# Altium PCB TP1PCB.PcbDoc
Units mm, origin at the board's own origin, x right, y up, seen from the top; angles counter-clockwise.
Board outline 100.05 x 100 mm, 3 copper layers (Top Layer, GND, Bottom Layer), stack 0.488 mm thick; 75 components, 44 nets, 206 pads, 6 vias.
Unrouted connection lines stored in the file: 2.
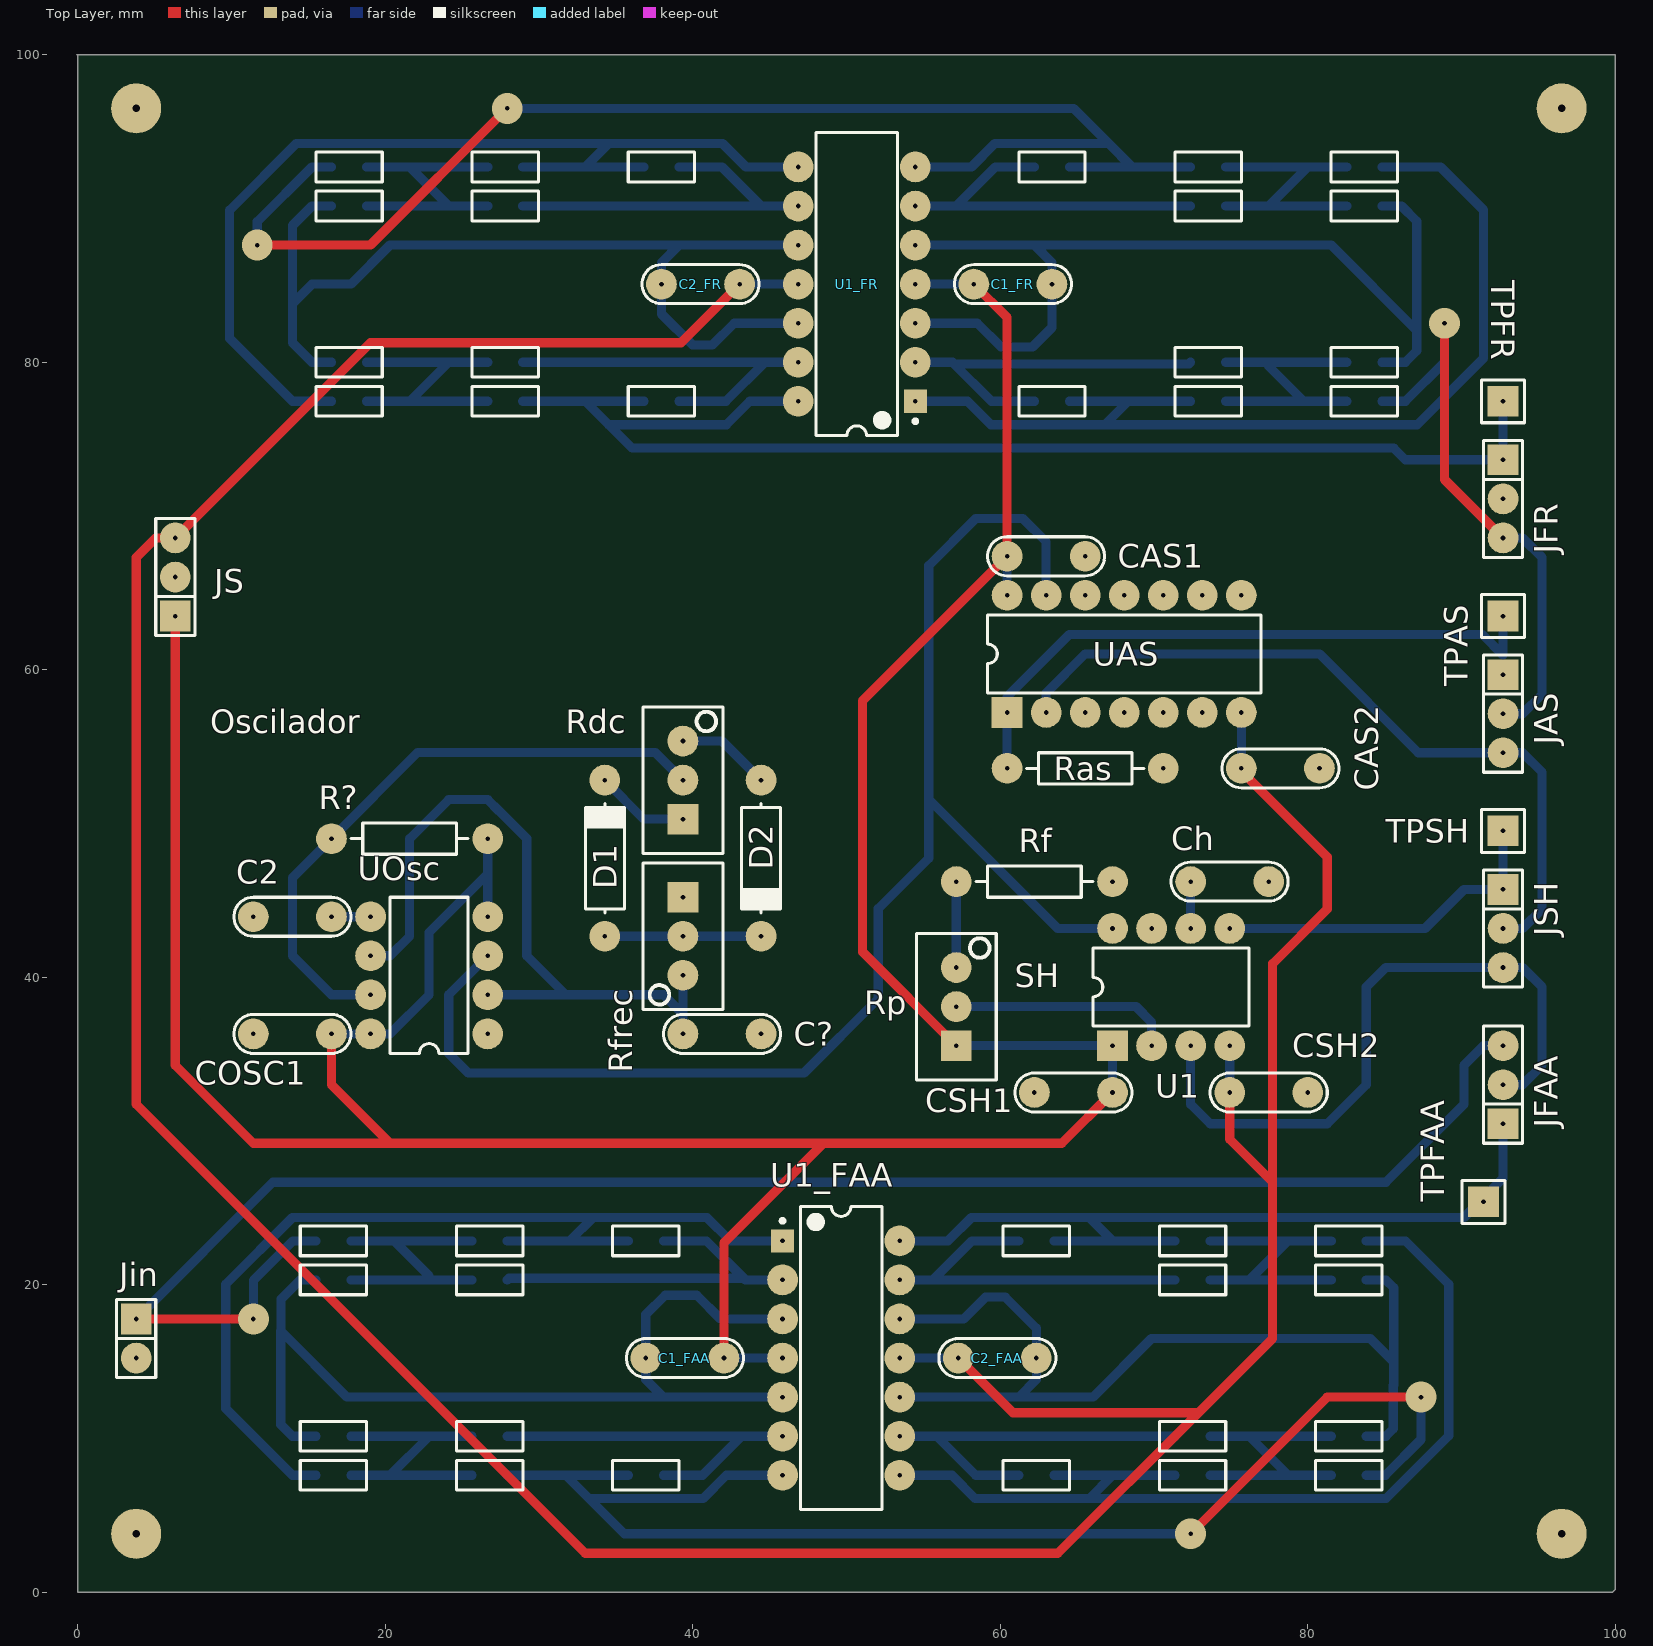
[diagram p0: Top Layer view]
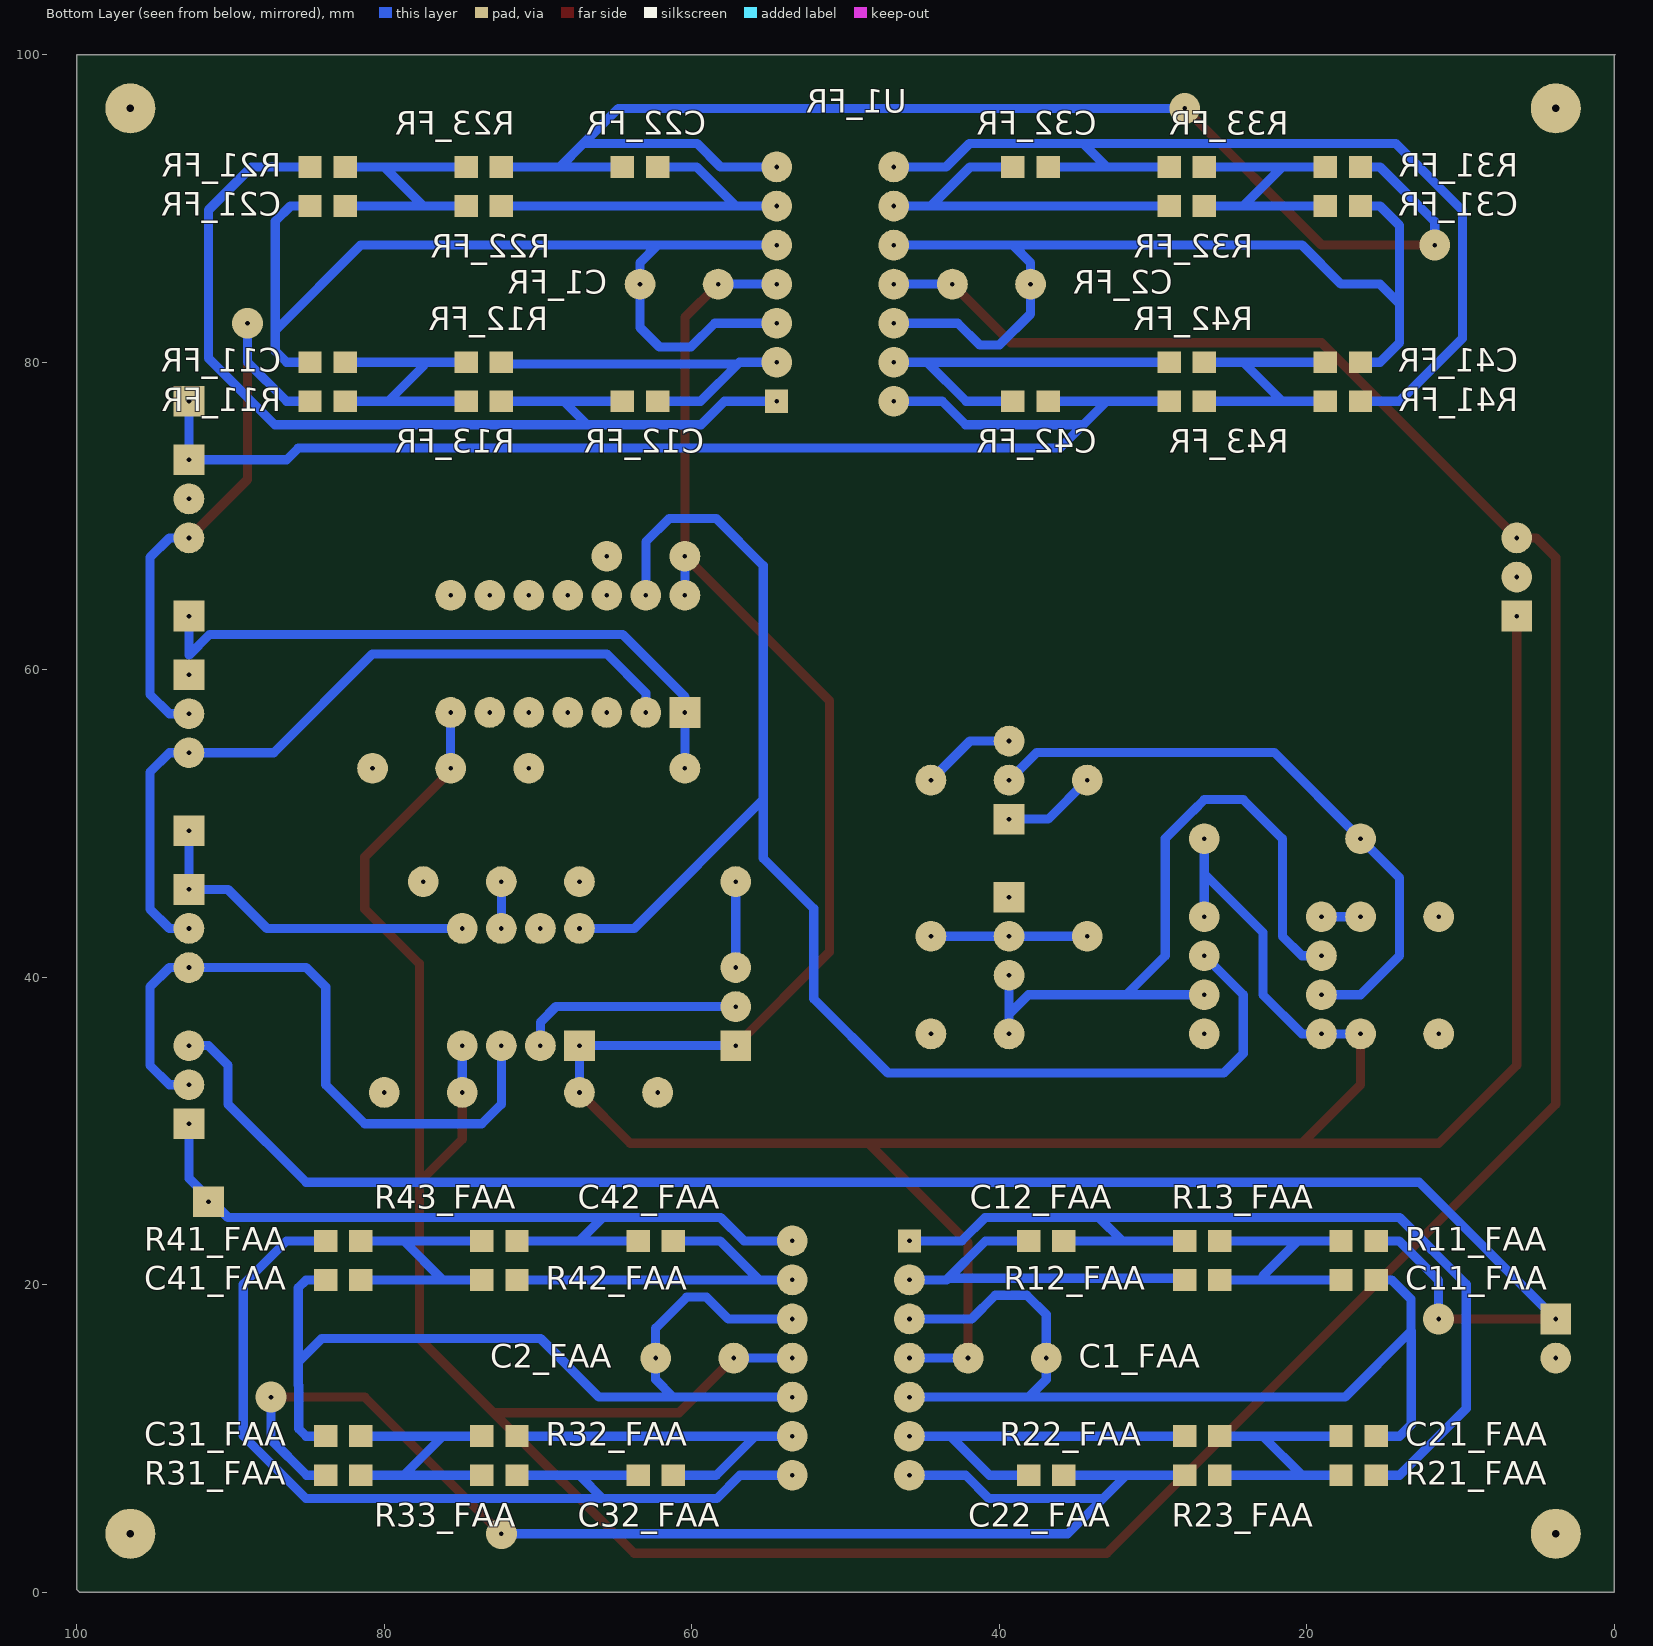
[diagram p1: Bottom Layer view, seen from below]
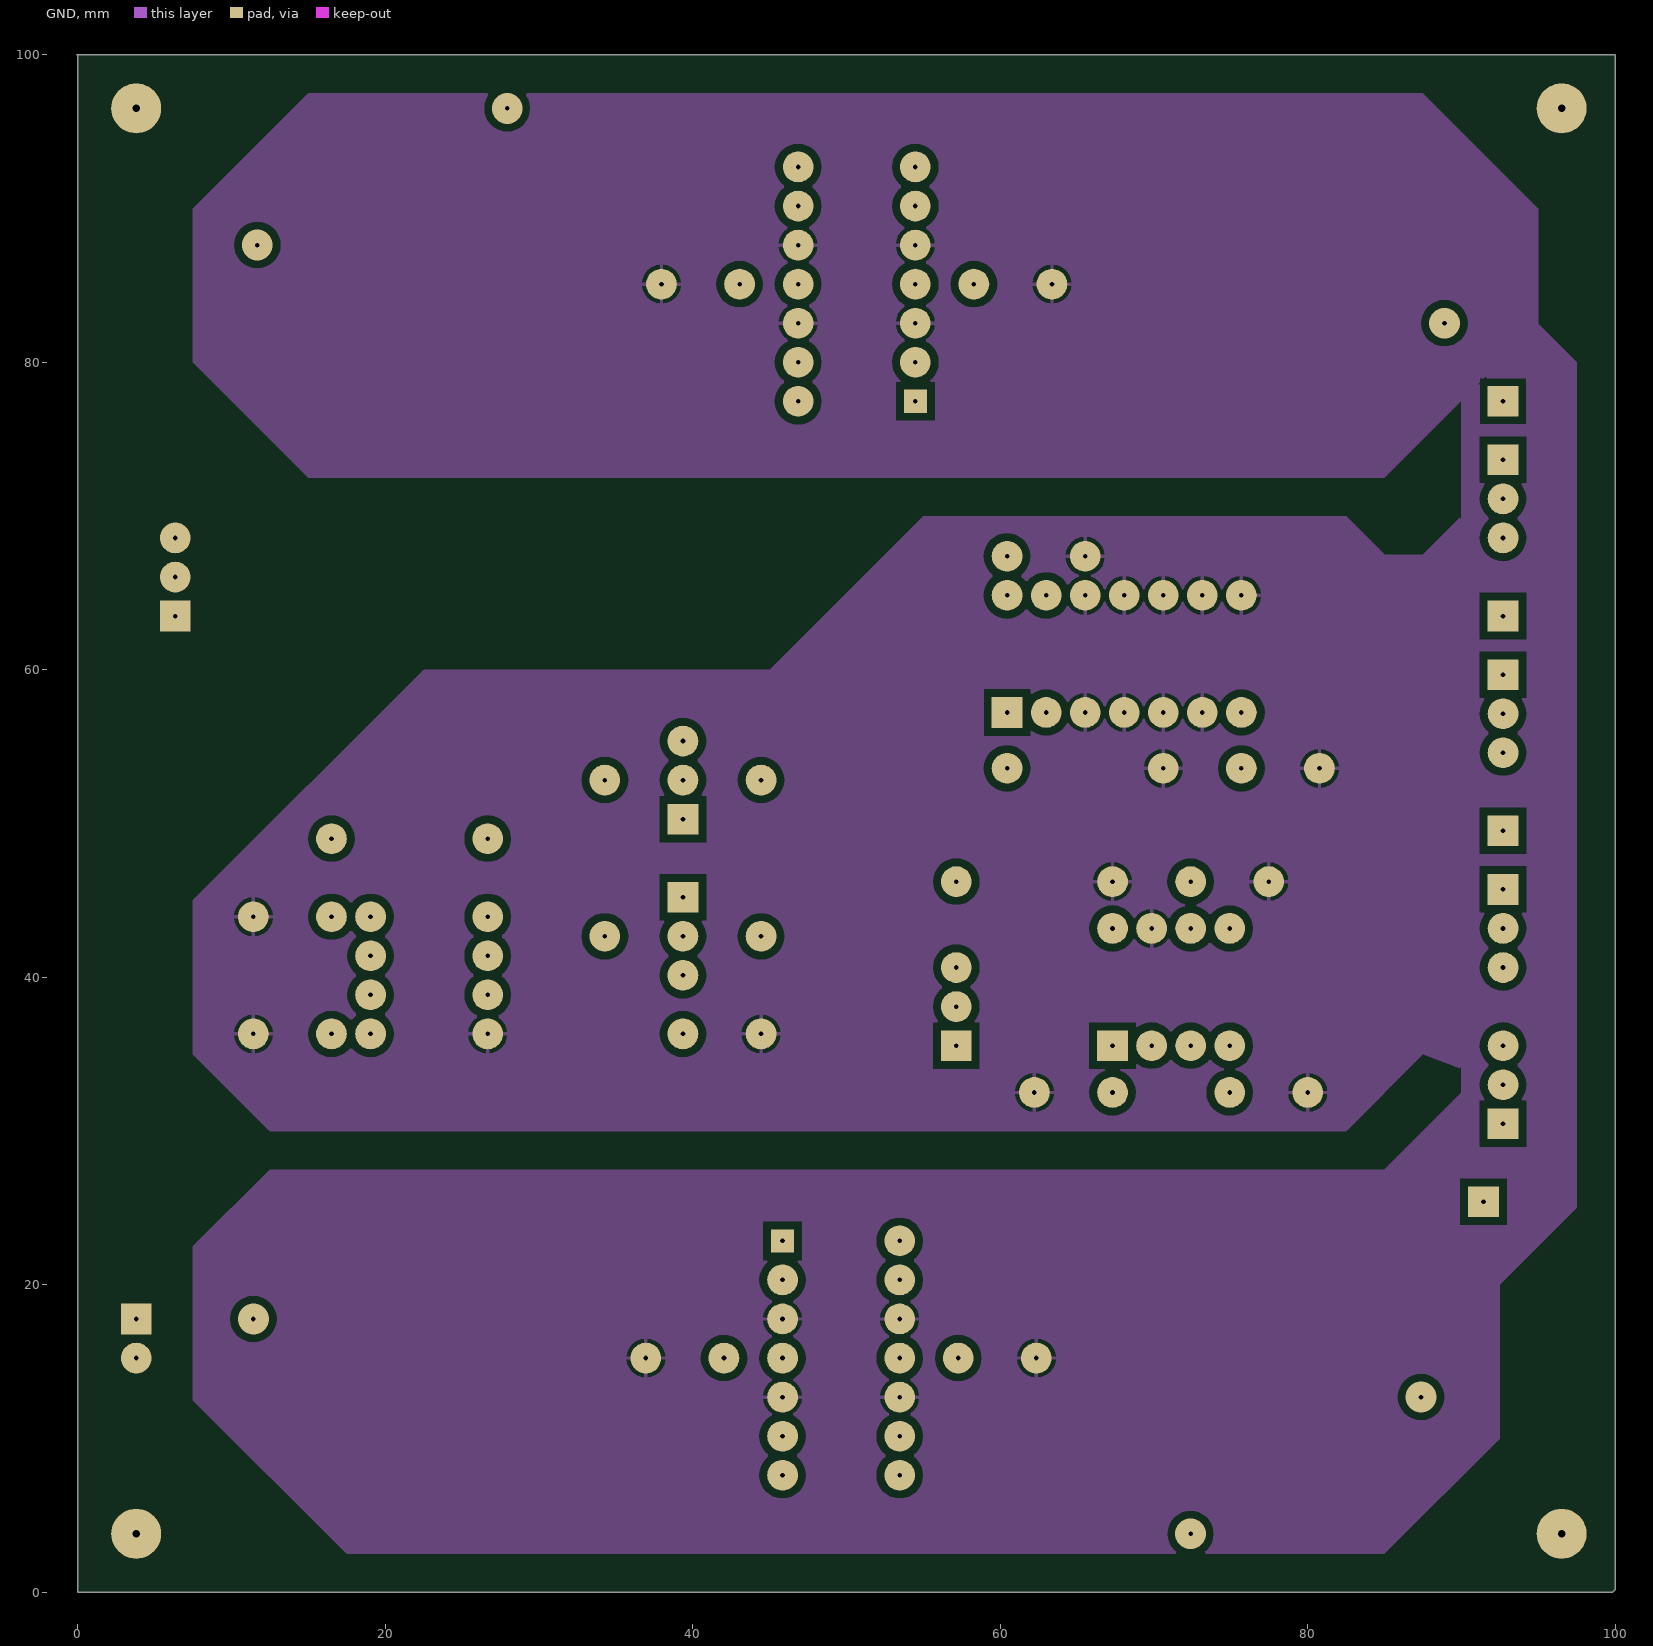
[diagram p2: GND]
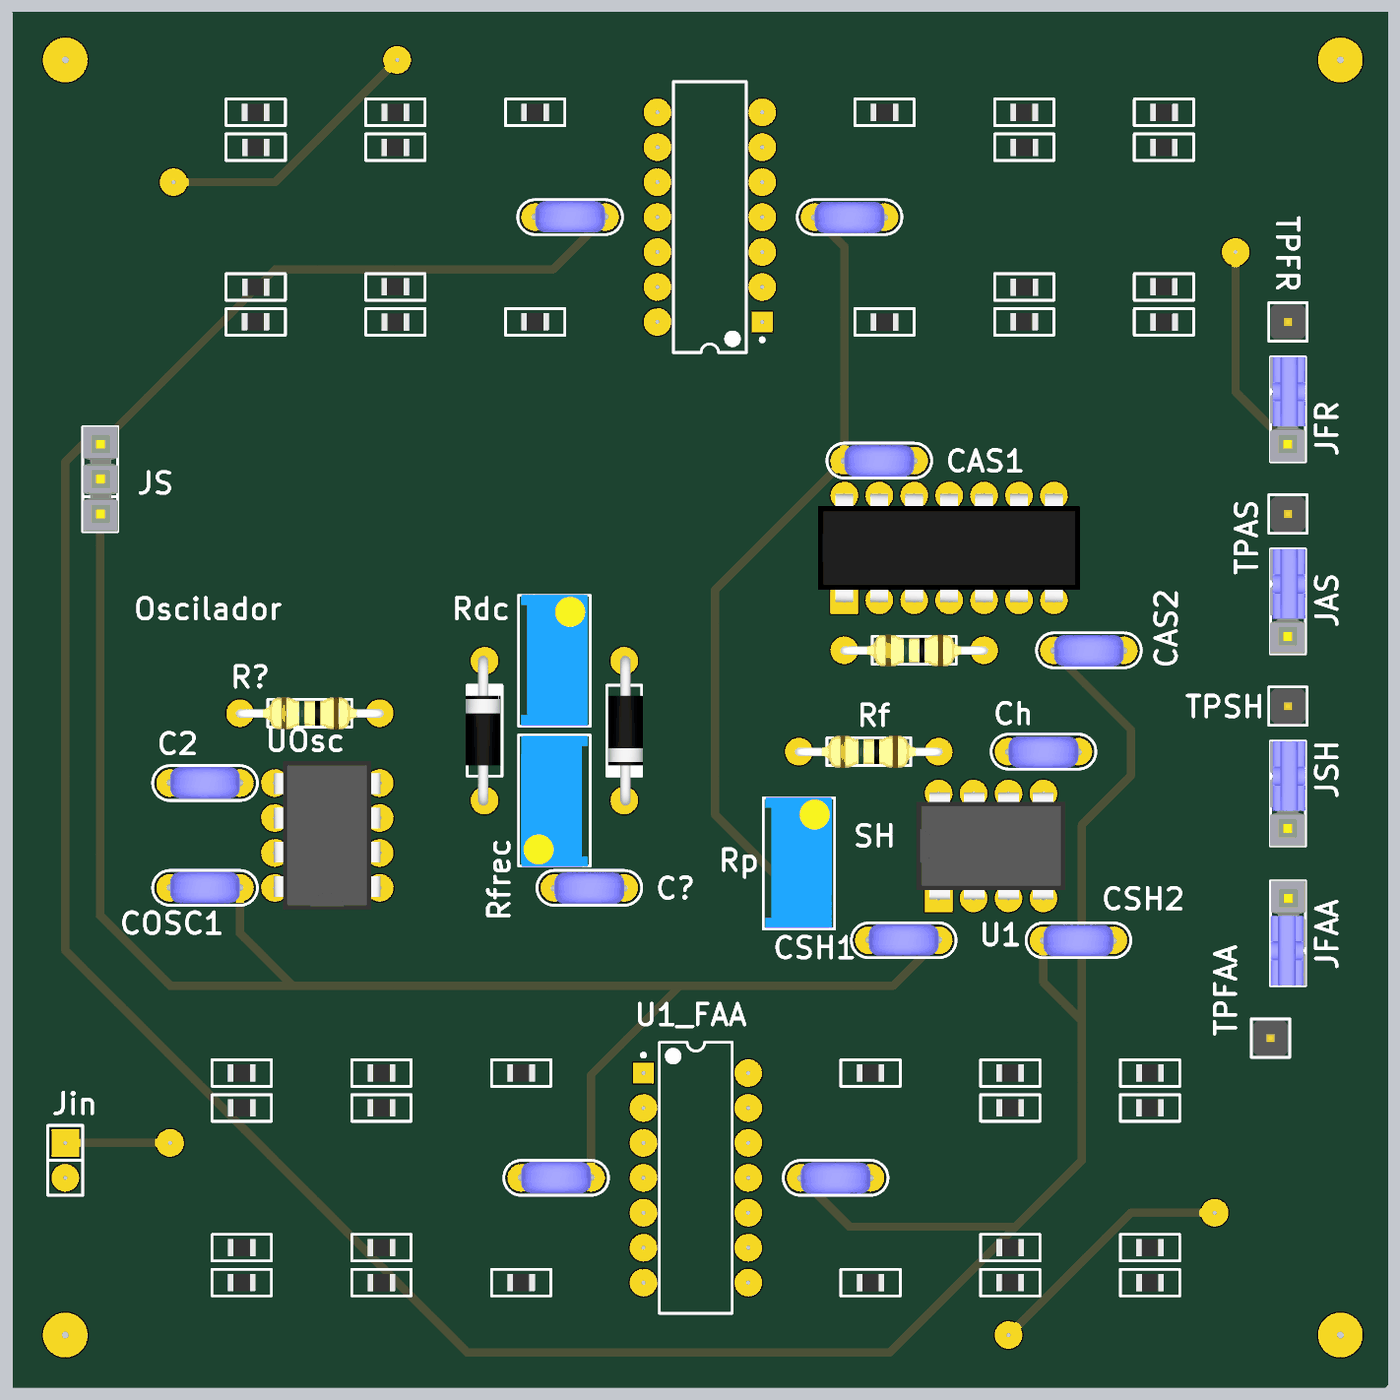
[diagram p3: 3D render of the assembled board from above, using the file's embedded part models]

## Layer stack, top to bottom
Top Solder: solder mask 0.0102, Solder Resist, Dk 3.5
Top Layer: signal copper 0.0356
Dielectric 1: core 0.254, FR-4, Dk 4.2
GND: signal copper 0.036
Dielectric 2: prepreg 0.127, Dk 4.2
Bottom Layer: signal copper 0.0356
Bottom Solder: solder mask 0.0102, Solder Resist, Dk 3.5

## Board outline
-0.05,100 0,99.95 0,0 99.825,0 100,0.175 100,100

## Design rules (kind name [scope] priority, off if disabled: settings)
Clearance [All] p1: gap=0.5 ignorepadtopadclearanceinfootprint=FALSE
PlaneConnect [All] p1: planeconnectstyle=Relief reliefexpansion=0.5 reliefentries=4 reliefconductorwidth=0.6 reliefairgap=0.6
PolygonConnect [All] p1: connectstyle=Relief reliefconductorwidth=0.254 reliefentries=4 polygonreliefangle="90 Angle" airgapwidth=0.254
RoomDefinition AS [InComponentClass('AS')] p1: confinementstyle=ConfineIn formatcopy=TRUE lockcomponents=FALSE outline 85.09,50.8 85.09,69.928 58.42,69.928 58.42,50.8
RoomDefinition Osc [InComponentClass('Osc')] p2: confinementstyle=ConfineIn formatcopy=TRUE lockcomponents=FALSE outline 6.35,31.75 52.07,31.75 52.07,58.928 6.35,58.928
RoomDefinition SH [InComponentClass('SH')] p3: confinementstyle=ConfineIn formatcopy=TRUE lockcomponents=FALSE outline 85.09,30.48 85.09,50.8 53.34,50.8 53.34,30.48
RoomDefinition FR [InComponentClass('FR')] p4: confinementstyle=ConfineIn formatcopy=TRUE lockcomponents=FALSE outline 97.79,97.79 3.81,97.79 3.81,72.39 97.79,72.39
RoomDefinition FAA [InComponentClass('FAA')] p5: confinementstyle=ConfineIn formatcopy=TRUE lockcomponents=FALSE outline 2.54,2.54 96.52,2.54 96.52,27.94 2.54,27.94
RoutingVias [All] p1: holewidth=0.3 width=1.5 viastyle="Through Hole" minholewidth=0.3 minwidth=1.5 maxholewidth=0.6 maxwidth=2
SolderMaskExpansion [All] p1: expansion=0.102
Width [All] p1: maxlimit=0.9 minlimit=0.6 preferedwidth=0.6
29 further rules are at their usual default settings.

## Classes and differential pairs
component class Osc: C2 C? COSC1 D1 D2 R? Rdc Rfrec UOsc
component class AS: CAS1 CAS2 CD4066 R1 Ras UAS
channel class LowPassFilter: FAA FR
component class TP1SCH: JAS JFAA JFR Jin JS JSH TPAS TPFAA TPFR TPSH
component class SH: Ch CSH1 CSH2 Rf Rp U1
component class FR: C1_FR C2_FR C11_FR C12_FR C21_FR C22_FR C31_FR C32_FR C41_FR C42_FR R11_FR R12_FR R13_FR R21_FR R22_FR R23_FR R31_FR R32_FR R33_FR R41_FR R42_FR R43_FR U1_FR
component class FAA: C1_FAA C2_FAA C11_FAA C12_FAA C21_FAA C22_FAA C31_FAA C32_FAA C41_FAA C42_FAA R11_FAA R12_FAA R13_FAA R21_FAA R22_FAA R23_FAA R31_FAA R32_FAA R33_FAA R41_FAA R42_FAA R43_FAA U1_FAA

## Components (designator, comment, footprint, x,y, rotation, side; value= is the part's Value field where it differs from the comment)
C1_FAA "CAP" CAP200 39.497,15.24 r180 top (schematic designator C1)
C1_FR "CAP" CAP200 60.833,85.09 r0 top (schematic designator C1)
C2 "10n" CAP200 13.97,43.942 r180 top
C2_FAA "CAP" CAP200 59.817,15.24 r0 top (schematic designator C2)
C2_FR "CAP" CAP200 40.513,85.09 r180 top (schematic designator C2)
C11_FAA "CAP" 0805 16.637,20.32 r180 top (schematic designator C11)
C11_FR "CAP" 0805 83.693,80.01 r0 top (schematic designator C11)
C12_FAA "CAP" 0805 36.957,22.86 r0 top (schematic designator C12)
C12_FR "CAP" 0805 63.373,77.47 r180 top (schematic designator C12)
C21_FAA "CAP" 0805 16.637,10.16 r180 top (schematic designator C21)
C21_FR "CAP" 0805 83.693,90.17 r0 top (schematic designator C21)
C22_FAA "CAP" 0805 36.957,7.62 r0 top (schematic designator C22)
C22_FR "CAP" 0805 63.373,92.71 r180 top (schematic designator C22)
C31_FAA "CAP" 0805 82.677,10.16 r0 top (schematic designator C31)
C31_FR "CAP" 0805 17.653,90.17 r180 top (schematic designator C31)
C32_FAA "CAP" 0805 62.357,7.62 r180 top (schematic designator C32)
C32_FR "CAP" 0805 37.973,92.71 r0 top (schematic designator C32)
C41_FAA "CAP" 0805 82.677,20.32 r0 top (schematic designator C41)
C41_FR "CAP" 0805 17.653,80.01 r180 top (schematic designator C41)
C42_FAA "CAP" 0805 62.357,22.86 r180 top (schematic designator C42)
C42_FR "CAP" 0805 37.973,77.47 r0 top (schematic designator C42)
C? "CAP" CAP200 41.91,36.322 r0 top
CAS1 "CAP" CAP200 62.992,67.388 r0 top
CAS2 "CAP" CAP200 78.232,53.594 r0 top
Ch "CAP" CAP200 74.93,46.228 r0 top
COSC1 "CAP" CAP200 13.97,36.322 r180 top
CSH1 "CAP" CAP200 64.77,32.512 r180 top
CSH2 "CAP" CAP200 77.47,32.512 r0 top
D1 "DIODO" DO41 34.29,47.752 r90 top
D2 "DIODO" DO41 44.45,47.752 r270 top
JAS "JUMPER" JUMPER3 92.71,57.15 r270 top
JFAA "JUMPER" JUMPER3 92.71,33.02 r90 top
JFR "JUMPER" JUMPER3 92.71,71.12 r270 top
Jin "CON2" SIP2 3.81,16.51 r270 top
JS "Fuente" SIP3 6.35,66.04 r90 top
JSH "JUMPER" JUMPER3 92.71,43.18 r270 top
R11_FAA "RES" 0805 16.637,22.86 r0 top (schematic designator R11)
R11_FR "RES" 0805 83.693,77.47 r180 top (schematic designator R11)
R12_FAA "RES" 0805 26.797,20.32 r0 top (schematic designator R12)
R12_FR "RES" 0805 73.533,80.01 r180 top (schematic designator R12)
R13_FAA "RES" 0805 26.797,22.86 r180 top (schematic designator R13)
R13_FR "RES" 0805 73.533,77.47 r0 top (schematic designator R13)
R21_FAA "RES" 0805 16.637,7.62 r0 top (schematic designator R21)
R21_FR "RES" 0805 83.693,92.71 r180 top (schematic designator R21)
R22_FAA "RES" 0805 26.797,10.16 r0 top (schematic designator R22)
R22_FR "RES" 0805 73.533,90.17 r180 top (schematic designator R22)
R23_FAA "RES" 0805 26.797,7.62 r180 top (schematic designator R23)
R23_FR "RES" 0805 73.533,92.71 r0 top (schematic designator R23)
R31_FAA "RES" 0805 82.677,7.62 r180 top (schematic designator R31)
R31_FR "RES" 0805 17.653,92.71 r0 top (schematic designator R31)
R32_FAA "RES" 0805 72.517,10.16 r180 top (schematic designator R32)
R32_FR "RES" 0805 27.813,90.17 r0 top (schematic designator R32)
R33_FAA "RES" 0805 72.517,7.62 r0 top (schematic designator R33)
R33_FR "RES" 0805 27.813,92.71 r180 top (schematic designator R33)
R41_FAA "RES" 0805 82.677,22.86 r180 top (schematic designator R41)
R41_FR "RES" 0805 17.653,77.47 r0 top (schematic designator R41)
R42_FAA "RES" 0805 72.517,20.32 r180 top (schematic designator R42)
R42_FR "RES" 0805 27.813,80.01 r0 top (schematic designator R42)
R43_FAA "RES" 0805 72.517,22.86 r0 top (schematic designator R43)
R43_FR "RES" 0805 27.813,77.47 r180 top (schematic designator R43)
R? "RES" RES400 26.67,49.022 r180 top
Ras "10k" RES400 70.612,53.594 r180 top
Rdc "PRESET" "PRESET V" 39.37,52.832 r90 top
Rf "RES" RES400 67.31,46.228 r180 top
Rfrec "PRESET" "PRESET V" 39.37,42.672 r270 top
Rp "PRESET" "PRESET V" 57.15,38.1 r90 top
TPAS "TP" TPTH 92.71,63.5 r90 top
TPFAA "TP" TPTH 91.44,25.4 r90 top
TPFR "TP" TPTH 92.71,77.47 r0 top
TPSH "TP" TPTH 92.71,49.53 r90 top
U1 "LF398" DIP8#1 67.31,35.56 r90 top
U1_FAA "TL084ACN" TI-N14 49.657,15.24 r0 top (schematic designator U1)
U1_FR "TL084ACN" TI-N14 50.673,85.09 r180 top (schematic designator U1)
UAS "CD4066" DIP14 60.452,57.228 r90 top
UOsc "NE 555" DIP8#2 26.67,36.322 r180 top

## Footprints (in the part's own frame and the unit in brackets; to place one, negate y for a bottom-side part, rotate by r counter-clockwise, add the part's x,y. Pads: shape width x height; smd on the part's side, far side on the other; paste and mask are expansions set on the pad)
0805 [mil] "Pasivo 0805"
  rect 60x56 smd far side: 1(-45,0) 2(45,0)
  silkscreen extent -85,-38 85,38, body extent -40,-25 39,25, height 15
CAP200 [mm]
  round 2 hole 0.3: 1(-2.54,0) 2(2.54,0)
  silkscreen extent -3.81,-1.27 3.81,1.27, body extent -2.79,-1.17 2.79,1.12, height 6.24
DIP8#1 [mm]
  rect 2x2 hole 0.3: 1(0,0)
  round 2 hole 0.3: 2(0,-2.54) 3(0,-5.08) 4(0,-7.62) 5(7.62,-7.62) 6(7.62,-5.08) 7(7.62,-2.54) 8(7.62,0)
  silkscreen extent 1.27,-8.89 6.35,1.27, body extent -0.06,-9.21 7.7,1.59, height 4.5
DIP8#2 [mm]
  round 2 hole 0.3: 1(0,0) 2(0,-2.54) 3(0,-5.08) 4(0,-7.62) 5(7.62,-7.62) 6(7.62,-5.08) 7(7.62,-2.54) 8(7.62,0)
  silkscreen extent 1.27,-8.89 6.35,1.27, body extent -0.06,-9.21 7.7,1.59, height 4.5
DIP14 [mm]
  rect 2x2 hole 0.3: 1(0,0)
  round 2 hole 0.3: 2(0,-2.54) 3(0,-5.08) 4(0,-7.62) 5(0,-10.16) 6(0,-12.7) 7(0,-15.24) 8(7.62,-15.24) 9(7.62,-12.7) 10(7.62,-10.16) 11(7.62,-7.62) 12(7.62,-5.08) 13(7.62,-2.54) 14(7.62,0)
  silkscreen extent 1.27,-16.51 6.35,1.27, body extent -0.13,-17.14 7.75,1.9, height 4.19
DO41 [mm]
  round 2 hole 0.3: 1(-5.08,0) 2(5.08,0)
  silkscreen extent -3.56,-1.27 3.56,1.27, body extent -5.46,-1.19 5.46,1.37, height 2.03
JUMPER3 [mm]
  rect 2x2 hole 0.3: 1(-2.54,0)
  round 2 hole 0.3: 2(0,0) 3(2.54,0)
  silkscreen extent -3.81,-1.27 3.81,1.27, body extent -3.81,-1.3 3.81,1.27, height 16.15
"PRESET V" [mm]
  rect 2x2 hole 0.3: 1(-2.54,0)
  round 2 hole 0.3: 2(0,0) 3(2.54,0)
  silkscreen extent -4.76,-2.6 4.76,2.6, body extent -4.7,-2.42 4.83,2.42, height 11.55
RES400 [mm]
  round 2 hole 0.3: 1(0,0) 2(10.16,0)
  silkscreen extent 1.27,-1.02 8.89,1.02, body extent -0.3,-1.14 10.46,1.17, height 2.43
SIP2 [mm]
  rect 2x2 hole 0.3: 1(-1.27,0)
  round 2 hole 0.3: 2(1.27,0)
  silkscreen extent -2.54,-1.27 2.54,1.27
SIP3 [mm]
  rect 2x2 hole 0.3: 1(-2.54,0)
  round 2 hole 0.3: 2(0,0) 3(2.54,0)
  silkscreen extent -3.81,-1.27 3.81,1.27, body extent -3.81,-1.3 3.81,1.24, height 8.38
TI-N14 [mm] "DIP, 14-Leads, Body 19.305x6.35 mm, Pitch 2.54 mm"
  rect 1.5x1.5 hole 0.3: 1(-3.81,7.62)
  round 2 hole 0.3: 2(-3.81,5.08) 3(-3.81,2.54) 4(-3.81,0) 5(-3.81,-2.54) 6(-3.81,-5.08) 7(-3.81,-7.62) 8(3.81,-7.62) 9(3.81,-5.08) 10(3.81,-2.54) 11(3.81,0) 12(3.81,2.54) 13(3.81,5.08) 14(3.81,7.62)
  silkscreen extent -3.93,-9.85 2.65,9.85, body extent -3.3,-9.85 3.3,9.85, height 5.08
TPTH [mm]
  rect 2x2 hole 0.3: 1(0,0)
  silkscreen extent -1.4,-1.4 1.4,1.4, body extent -1.27,-1.27 1.27,1.27, height 6.04

## Part data
C2: library part CAP
JAS JFAA JFR JSH: library part JUMPER3
JS: library part CON3
Ras: library part RES
U1 UOsc: library part IC_DIP8
U1_FAA U1_FR: "JFET-Input Operational Amplifier, 7 to 36 V, 0 to 70 degC, 14-pin DIP (N14), Pb-Free (RoHS)", Manufacturer="Texas Instruments", Rating=Catalog, Supplier Part Number 1=296-1782-5-ND, Total Supply Voltage(Max)(+5V is 5, +/-5V is 10)=36, Total Supply Voltage(Min)(+5V is 5, +/-5V is 10)=7, CMRR(Min)(dB)=75, Code_JEDEC=MS-001, ComponentLink1Description="Manufacturer URL", ComponentLink1URL=http://www.ti.com/, ComponentLink2Description=Datasheet, ComponentLink2URL=http://www.ti.com/lit/ds/symlink/tl084a.pdf, ComponentLink3Description="Package Specification", ComponentLink3URL=http://www.ti.com/lit/ml/mpdi002c/mpdi002c.pdf, DatasheetVersion=SLOS081G, Eco-Plan="Pb-Free (RoHS)", GBW(Typ)(MHz)=3, IIB(Max)(pA)=200, Iq per channel(Max)(mA)=2.8, Mounting Technology="Through Hole", Number of Channels=4, Offset Drift(Typ)(uV/C)=18, PackageDescription="14-Pin Plastic In-Line, Body 19.305 x 6.35 mm, Pitch 2.54 mm", PackageReference=N14, PackageVersion="4040049/E, 12/2002", PartNumber=TL084ACN, Slew Rate(Typ)(V/us)=13, Sub Family="General Purpose Amplifier, High Supply Voltage Amplifier (>=30V)", Supplier 1=Digi-Key, Supplier 2=Farnell, Supplier 3=Newark, Supplier 4=Mouser, Supplier Part Number 2=1106129, Supplier Part Number 3=08F9361, Supplier Part Number 4=595-TL084ACN, Vio (25C)(Max)(mV)=6, Vn at 1kHz(Typ)(nV/rtHz)=18
UAS: library part IC_DIP14

## Free pads (board coordinates)
  round 3.25 hole 0.5: 2(3.81,3.81) 2(3.81,96.52) 2(96.52,3.81) 2(96.52,96.52)

## Via types
v1: diameter 2, hole 0.3, Top Layer to Bottom Layer, 6 vias

## Nets (pads, with @x,y where several pads share a name; then routed paths per layer and width w, separated by ;. In a path a pad name is that pad's centre, name@x,y a point inside that pad or via, vN(x,y) a via of type N, cw(c..) or ccw(c..) an arc to the next point about the centre after c; other vN are vias at no path point)
+VCC: C1_FAA.1 C1_FR.1 CAS1.1 COSC1.1 CSH1.1 JS.1 R?.1 Rp.1 U1.1 U1_FAA.4 U1_FR.4 UAS.14 UOsc.4 UOsc.8 | length 221.1
  Top Layer w0.6: JS.1 6.35,34.29 11.43,29.21 20.32,29.21 ; COSC1.1 16.51,33.02 20.32,29.21 ; C1_FAA.1 42.037,22.733 48.514,29.21 ; Rp.1 57.144,35.56 51.048,41.656 51.048,57.984 CAS1.1 60.452,82.931 C1_FR.1 ; CSH1.1 64.008,29.21 48.514,29.21 ; 20.32,29.21 48.514,29.21
  Bottom Layer w0.6: COSC1.1 UOsc.8 20.32,36.322 22.86,38.862 22.86,42.926 26.67,46.736 ; UOsc.4 26.67,46.736 ; R?.1 26.67,46.736 ; C1_FAA.1 U1_FAA.4 ; U1_FR.4 C1_FR.1 ; Rp.1 U1.1 CSH1.1 ; UAS.14 CAS1.1
-VCC: C2_FAA.1 C2_FR.1 CAS2.1 CSH2.1 JS.3 U1.4 U1_FAA.11 U1_FR.11 UAS.7 | length 253
  Top Layer w0.6: C2_FR.1 39.243,81.28 19.05,81.28 JS.3 5.08,68.58 3.81,67.31 3.81,31.75 33.02,2.54 63.754,2.54 72.898,11.684 ; C2_FAA.1 60.833,11.684 72.898,11.684 ; CSH2.1 74.93,29.464 77.724,26.67 ; CAS2.1 75.692,53.418 81.28,47.83 81.28,44.45 77.724,40.894 77.724,26.67 ; 72.898,11.684 77.724,16.51 77.724,26.67
  Bottom Layer w0.6: C2_FR.1 U1_FR.11 ; U1_FAA.11 C2_FAA.1 ; CSH2.1 U1.4 ; CAS2.1 UAS.7@75.692,56.974
CTRL: U1.8 UAS.13 UOsc.3 | length 95.9
  Bottom Layer w0.6: UOsc.3 26.664,41.402 24.13,38.868 24.13,35.052 25.4,33.782 47.244,33.782 52.07,38.608 52.07,44.472 55.35,47.752 55.35,51.584 ; UAS.13 62.992,68.326 61.468,69.85 58.42,69.85 55.35,66.78 55.35,51.584 ; U1.8 63.754,43.18 55.35,51.584
Discharge: R?.2 Rdc.2 UOsc.7 | length 40.7
  Bottom Layer w0.6: UOsc.7 16.51,38.862 13.97,41.402 13.97,46.482 R?.2 22.12,54.632 37.57,54.632 37.57,54.626 39.364,52.832 Rdc.2
GND: C1_FAA.2 C1_FR.2 C2.2 C2_FAA.2 C2_FR.2 C11_FAA.2 C11_FR.2 C21_FAA.2 C21_FR.2 C31_FAA.2 C31_FR.2 C41_FAA.2 C41_FR.2 C?.2 CAS1.2 CAS2.2 Ch.2 COSC1.2 CSH1.2 CSH2.2 Jin.2 JS.2 Ras.1 Rf.1 U1.7 U1_FAA.3 U1_FAA.5 U1_FAA.10 U1_FAA.12 U1_FR.3 U1_FR.5 U1_FR.10 U1_FR.12 UAS.3 UAS.4 UAS.5 UAS.6 UAS.8 UAS.9 UAS.10 UAS.11 UAS.12 UOsc.1 | length 254.6
  Bottom Layer w0.6: C21_FAA.2 13.97,10.16 13.208,10.922 13.208,17.012 ; C11_FAA.2 14.478,20.32 13.23,19.072 13.23,17.034 13.208,17.012 ; C41_FR.2 15.24,80.01 13.97,81.28 13.97,83.82 ; C31_FR.2 15.24,90.17 13.97,88.9 13.97,83.82 ; U1_FAA.5 38.1,12.7 ; U1_FAA.3 41.816,17.78 40.266,19.33 38.22,19.33 36.957,18.067 C1_FAA.2 36.957,13.843 38.1,12.7 ; U1_FR.12 42.705,82.55 41.282,81.127 39.998,81.127 37.973,83.152 C2_FR.2 37.973,86.487 39.116,87.63 ; U1_FR.10 39.116,87.63 ; U1_FAA.10 61.214,12.7 ; U1_FAA.12 57.625,17.78 59.048,19.203 60.332,19.203 62.357,17.178 C2_FAA.2 62.357,13.843 61.214,12.7 ; U1_FR.3 58.514,82.55 60.064,81 62.11,81 63.373,82.263 C1_FR.2 63.373,86.487 62.23,87.63 ; U1_FR.5 62.23,87.63 ; C31_FAA.2 85.09,10.16 85.576,10.646 85.576,13.446 85.598,13.468 85.598,14.986 ; C41_FAA.2 85.09,20.32 85.598,19.812 85.598,14.986 ; C11_FR.2 86.36,80.01 87.1,80.75 87.1,82.064 ; C21_FR.2 86.106,90.17 87.1,89.176 87.1,82.064 ; 13.208,17.012 17.52,12.7 38.1,12.7 ; 13.97,83.82 15.24,85.09 17.78,85.09 20.32,87.63 39.116,87.63 ; 61.214,12.7 66.04,12.7 69.85,16.51 84.074,16.51 85.598,14.986 ; 62.23,87.63 81.534,87.63 87.1,82.064
NetC2_1: C2.1 UOsc.5 | length 2.5
  Bottom Layer w0.6: C2.1 UOsc.5
NetCh_1: Ch.1 U1.6 | length 3
  Bottom Layer w0.6: U1.6 Ch.1
NetD1_1: D1.1 D2.2 Rfrec.2 | length 10.2
  Bottom Layer w0.6: D1.1 Rfrec.2 D2.2
NetD1_2: D1.2 Rdc.1 | length 6.1
  Bottom Layer w0.6: D1.2 36.83,50.292 Rdc.1
NetD2_1: D2.1 Rdc.3 | length 6.1
  Bottom Layer w0.6: Rdc.3 41.91,55.372 D2.1
NetJAS_1: JAS.1 Ras.2 TPAS.1 UAS.1 | length 41.7
  Bottom Layer w0.6: Ras.2 UAS.1 60.452,58.244 64.516,62.308 91.362,62.308 92.71,60.96 TPAS.1
NetJAS_2: JAS.2 JFR.3 R11_FR.1 | length 38.2
  Top Layer w0.6: v1(88.9,82.55) 88.9,72.384 92.704,68.58 JFR.3
  Bottom Layer w0.6: R11_FR.1 86.36,77.47 88.9,80.01 v1(88.9,82.55) ; JAS.2 93.98,57.15 95.25,58.42 95.25,67.31 93.98,68.58 JFR.3
NetJAS_3: JAS.3 JSH.2 UAS.2 | length 49.7
  Bottom Layer w0.6: UAS.2 62.992,58.498 65.532,61.038 80.772,61.038 87.2,54.61 JAS.3 93.98,54.61 95.25,53.34 95.25,44.45 93.98,43.18 JSH.2
NetRf_2: Rf.2 Rp.3 | length 5.6
  Bottom Layer w0.6: Rp.3 Rf.2
NetRp_2: Rp.2 U1.2 | length 14.6
  Bottom Layer w0.6: Rp.2 68.834,38.1 69.85,37.084 U1.2
V1out_FAA: C12_FAA.1 R13_FAA.1 R21_FAA.1 U1_FAA.1 | length 64.4
  Bottom Layer w0.6: R21_FAA.1 13.97,7.62 9.63,11.96 9.63,20.044 13.97,24.384 33.528,24.384 ; R13_FAA.1 32.004,22.86 ; C12_FAA.1 32.004,22.86 ; U1_FAA.1 42.45,22.86 40.926,24.384 33.528,24.384 ; 32.004,22.86 33.528,24.384
V1out_FR: C12_FR.1 R13_FR.1 R21_FR.1 U1_FR.1 | length 66.8
  Bottom Layer w0.6: U1_FR.1 57.88,77.47 59.404,75.946 66.802,75.946 ; C12_FR.1 68.326,77.47 ; R13_FR.1 68.326,77.47 ; R21_FR.1 88.646,92.71 91.44,89.916 91.44,80.264 87.122,75.946 66.802,75.946 ; 66.802,75.946 68.326,77.47
V2out_FAA: C22_FAA.1 R23_FAA.1 R31_FAA.1 U1_FAA.7 | length 89.2
  Top Layer w0.6: v1(72.39,3.81) 81.28,12.7 v1(87.376,12.7)
  Bottom Layer w0.6: R23_FAA.1 31.75,7.62 ; C22_FAA.1 31.75,7.62 ; U1_FAA.7 42.196,7.62 40.672,6.096 33.274,6.096 ; v1(72.39,3.81) 35.56,3.81 33.274,6.096 ; R31_FAA.1 85.058,7.62 87.376,9.938 v1(87.376,12.7) ; 31.75,7.62 33.274,6.096
V2out_FR: C22_FR.1 R23_FR.1 R31_FR.1 U1_FR.7 | length 91.1
  Top Layer w0.6: v1(11.684,87.63) 19.05,87.63 v1(27.94,96.52)
  Bottom Layer w0.6: v1(11.684,87.63) 11.684,89.154 15.24,92.71 R31_FR.1 ; v1(27.94,96.52) 64.77,96.52 67.056,94.234 ; U1_FR.7 58.134,92.71 59.658,94.234 67.056,94.234 ; C22_FR.1 68.58,92.71 ; R23_FR.1 68.58,92.71 ; 67.056,94.234 68.58,92.71
V3out_FAA: C32_FAA.1 R33_FAA.1 R41_FAA.1 U1_FAA.8 | length 64.4
  Bottom Layer w0.6: U1_FAA.8 56.864,7.62 58.388,6.096 65.786,6.096 ; C32_FAA.1 67.31,7.62 ; R33_FAA.1 67.31,7.62 ; R41_FAA.1 86.36,22.86 89.176,20.044 89.176,10.182 85.09,6.096 65.786,6.096 ; 65.786,6.096 67.31,7.62
V3out_FR: C32_FR.1 R33_FR.1 R41_FR.1 U1_FR.8 | length 66.1
  Bottom Layer w0.6: R41_FR.1 13.97,77.47 9.884,81.556 9.884,89.894 14.224,94.234 34.544,94.234 ; R33_FR.1 33.02,92.71 ; C32_FR.1 33.02,92.71 ; U1_FR.8 43.466,92.71 41.942,94.234 34.544,94.234 ; 33.02,92.71 34.544,94.234
V4out_FAA: C42_FAA.1 JFAA.1 R43_FAA.1 TPFAA.1 U1_FAA.14 | length 54.8
  Bottom Layer w0.6: U1_FAA.14 56.61,22.86 58.134,24.384 65.786,24.384 ; C42_FAA.1 67.31,22.86 ; R43_FAA.1 67.31,22.86 ; JFAA.1@92.71,30.734 JFAA.1 92.71,26.924 90.17,24.384 65.786,24.384 ; 65.786,24.384 67.31,22.86
V4out_FR: C42_FR.1 JFR.1 R43_FR.1 TPFR.1 U1_FR.14 | length 85.9
  Bottom Layer w0.6: R43_FR.1 33.02,77.47 ; C42_FR.1 33.02,77.47 ; U1_FR.14 43.72,77.47 42.196,75.946 34.544,75.946 ; TPFR.1 JFR.1 86.36,73.66 85.598,74.422 36.068,74.422 34.544,75.946 ; 33.02,77.47 34.544,75.946
V-1_FAA: C12_FAA.2 R12_FAA.2 U1_FAA.2 | length 24.4
  Bottom Layer w0.6: R12_FAA.2 28.05,20.43 43.324,20.43 43.434,20.32 ; C12_FAA.2 40.894,22.86 43.434,20.32 ; U1_FAA.2 43.434,20.32
V-1_FR: C12_FR.2 R12_FR.2 U1_FR.2 | length 24.4
  Bottom Layer w0.6: U1_FR.2 56.896,80.01 ; C12_FR.2 59.436,77.47 56.896,80.01 ; R12_FR.2 72.28,79.9 57.006,79.9 56.896,80.01
V-2_FAA: C22_FAA.2 R22_FAA.2 U1_FAA.6 | length 24
  Bottom Layer w0.6: R22_FAA.2 43.18,10.16 ; C22_FAA.2 40.64,7.62 43.18,10.16 ; U1_FAA.6 43.18,10.16
V-2_FR: C22_FR.2 R22_FR.2 U1_FR.6 | length 24
  Bottom Layer w0.6: U1_FR.6 57.15,90.17 ; C22_FR.2 59.69,92.71 57.15,90.17 ; R22_FR.2 57.15,90.17
V-3_FAA: C32_FAA.2 R32_FAA.2 U1_FAA.9 | length 24.3
  Bottom Layer w0.6: U1_FAA.9 55.88,10.16 ; C32_FAA.2 58.42,7.62 55.88,10.16 ; R32_FAA.2 55.88,10.16
V-3_FR: C32_FR.2 R32_FR.2 U1_FR.9 | length 24.3
  Bottom Layer w0.6: R32_FR.2 44.45,90.17 ; C32_FR.2 41.91,92.71 44.45,90.17 ; U1_FR.9 44.45,90.17
V-4_FAA: C42_FAA.2 R42_FAA.2 U1_FAA.13 | length 24.5
  Bottom Layer w0.6: U1_FAA.13 55.626,20.32 ; C42_FAA.2 58.166,22.86 55.626,20.32 ; R42_FAA.2 55.626,20.32
V-4_FR: C42_FR.2 R42_FR.2 U1_FR.13 | length 24.5
  Bottom Layer w0.6: R42_FR.2 44.704,80.01 ; C42_FR.2 42.164,77.47 44.704,80.01 ; U1_FR.13 44.704,80.01
Vc: C?.1 Rfrec.3 UOsc.2 UOsc.6 | length 47.4
  Bottom Layer w0.6: UOsc.6 20.32,41.402 21.59,42.672 21.59,49.022 24.13,51.562 26.67,51.562 27.41,50.822 27.416,50.822 29.21,49.028 29.21,41.402 31.75,38.862 ; UOsc.2 31.75,38.862 ; C?.1 39.37,37.592 ; Rfrec.3 39.37,37.592 ; 31.75,38.862 38.1,38.862 39.37,37.592
Vx1_FAA: C11_FAA.1 R11_FAA.2 R12_FAA.1 R13_FAA.2 | length 19.2
  Bottom Layer w0.6: C11_FAA.1 22.86,20.32 ; R11_FAA.2 20.574,22.86 ; R12_FAA.1 22.86,20.32 ; R13_FAA.2 20.574,22.86 ; 20.574,22.86 22.86,20.574 22.86,20.32
Vx1_FR: C11_FR.1 R11_FR.2 R12_FR.1 R13_FR.2 | length 19.2
  Bottom Layer w0.6: R13_FR.2 79.756,77.47 ; R12_FR.1 77.47,80.01 ; R11_FR.2 79.756,77.47 ; C11_FR.1 77.47,80.01 ; 77.47,80.01 77.47,79.756 79.756,77.47
Vx2_FAA: C21_FAA.1 R21_FAA.2 R22_FAA.1 R23_FAA.2 | length 19.3
  Bottom Layer w0.6: R21_FAA.2 20.32,7.62 ; C21_FAA.1 22.86,10.16 ; R23_FAA.2 20.32,7.62 ; R22_FAA.1 22.86,10.16 ; 20.32,7.62 22.86,10.16
Vx2_FR: C21_FR.1 R21_FR.2 R22_FR.1 R23_FR.2 | length 19.3
  Bottom Layer w0.6: R22_FR.1 77.47,90.17 ; R23_FR.2 80.01,92.71 ; C21_FR.1 77.47,90.17 ; R21_FR.2 80.01,92.71 ; 77.47,90.17 80.01,92.71
Vx3_FAA: C31_FAA.1 R31_FAA.2 R32_FAA.1 R33_FAA.2 | length 19.3
  Bottom Layer w0.6: R33_FAA.2 78.74,7.62 ; R32_FAA.1 76.2,10.16 ; R31_FAA.2 78.74,7.62 ; C31_FAA.1 76.2,10.16 ; 76.2,10.16 78.74,7.62
Vx3_FR: C31_FR.1 R31_FR.2 R32_FR.1 R33_FR.2 | length 19.3
  Bottom Layer w0.6: C31_FR.1 24.13,90.17 ; R31_FR.2 21.59,92.71 ; R32_FR.1 24.13,90.17 ; R33_FR.2 21.59,92.71 ; 21.59,92.71 24.13,90.17
Vx4_FAA: C41_FAA.1 R41_FAA.2 R42_FAA.1 R43_FAA.2 | length 19.3
  Bottom Layer w0.6: R42_FAA.1 76.2,20.32 ; R43_FAA.2 78.74,22.86 ; C41_FAA.1 76.2,20.32 ; R41_FAA.2 78.74,22.86 ; 76.2,20.32 78.74,22.86
Vx4_FR: C41_FR.1 R41_FR.2 R42_FR.1 R43_FR.2 | length 19.3
  Bottom Layer w0.6: R41_FR.2 21.59,77.47 ; C41_FR.1 24.13,80.01 ; R43_FR.2 21.59,77.47 ; R42_FR.1 24.13,80.01 ; 21.59,77.47 24.13,80.01
Xin: JFAA.3 Jin.1 R11_FAA.1 | length 113
  Top Layer w0.6: Jin.1 v1(11.43,17.78)
  Bottom Layer w0.6: Jin.1 12.7,26.67 85.09,26.67 90.17,31.75 90.17,34.29 91.44,35.56 JFAA.3 ; v1(11.43,17.78) 11.43,20.288 14.002,22.86 R11_FAA.1
Xin: JFAA.2 JSH.3 U1.3 | length 43.8
  Bottom Layer w0.6: U1.3 72.39,31.75 73.66,30.48 81.28,30.48 83.82,33.02 83.82,39.37 85.09,40.64 JSH.3 93.98,40.64 95.25,39.37 95.25,34.29 93.98,33.02 JFAA.2
Xout: JFR.2
Xout: JSH.1 TPSH.1 U1.5 | length 22.6
  Bottom Layer w0.6: U1.5 87.63,43.18 90.17,45.72 JSH.1 TPSH.1
pads on no net: Rfrec.1

## Polygon pours and split planes (outlines as drawn)
GND on GND "GND-GND" (solid, pour order 14): 85,67.5 87.5,67.5 90,70 90,34.036 87.5,35 85,37.5
no net on GND "GND-No Net" (solid, pour order 10): 90,65
GND on GND "GND-GND 1" (solid, pour order 8): 92.5,20 97.5,25 97.5,80 95,82.5 90,77.5 90,32.5 85,27.5
GND on GND "GND-GND 2" (solid, pour order 6): 12.5,27.5 7.5,22.5 7.5,12.5 17.5,2.5 85,2.5 92.5,10 92.5,20 85,27.5
GND on GND "GND-GND 3" (solid, pour order 4): 55,70 45,60 22.5,60 7.5,45 7.5,35 12.5,30 82.5,30 87.5,35 87.5,65 82.5,70
GND on GND "GND-GND 4" (solid, pour order 2): 95,90 87.5,97.5 15,97.5 7.5,90 7.5,80 15,72.5 85,72.5 95,82.5

## Silkscreen, mask and mechanical layers (free items; w line width, h text height)
Top Overlay:
  text "Oscilador" at 8.636,55.88 h1.52
  text "SH" at 60.96,39.37 h1.52